# Altium PCB PCB_FINAL_WISH.PcbDoc
Units mm, origin at the board's own origin, x right, y up, seen from the top; angles counter-clockwise.
Board outline 80 x 80 mm, 2 copper layers (Top Layer, Bottom Layer); 12 components, 12 nets, 73 pads, 1 vias.
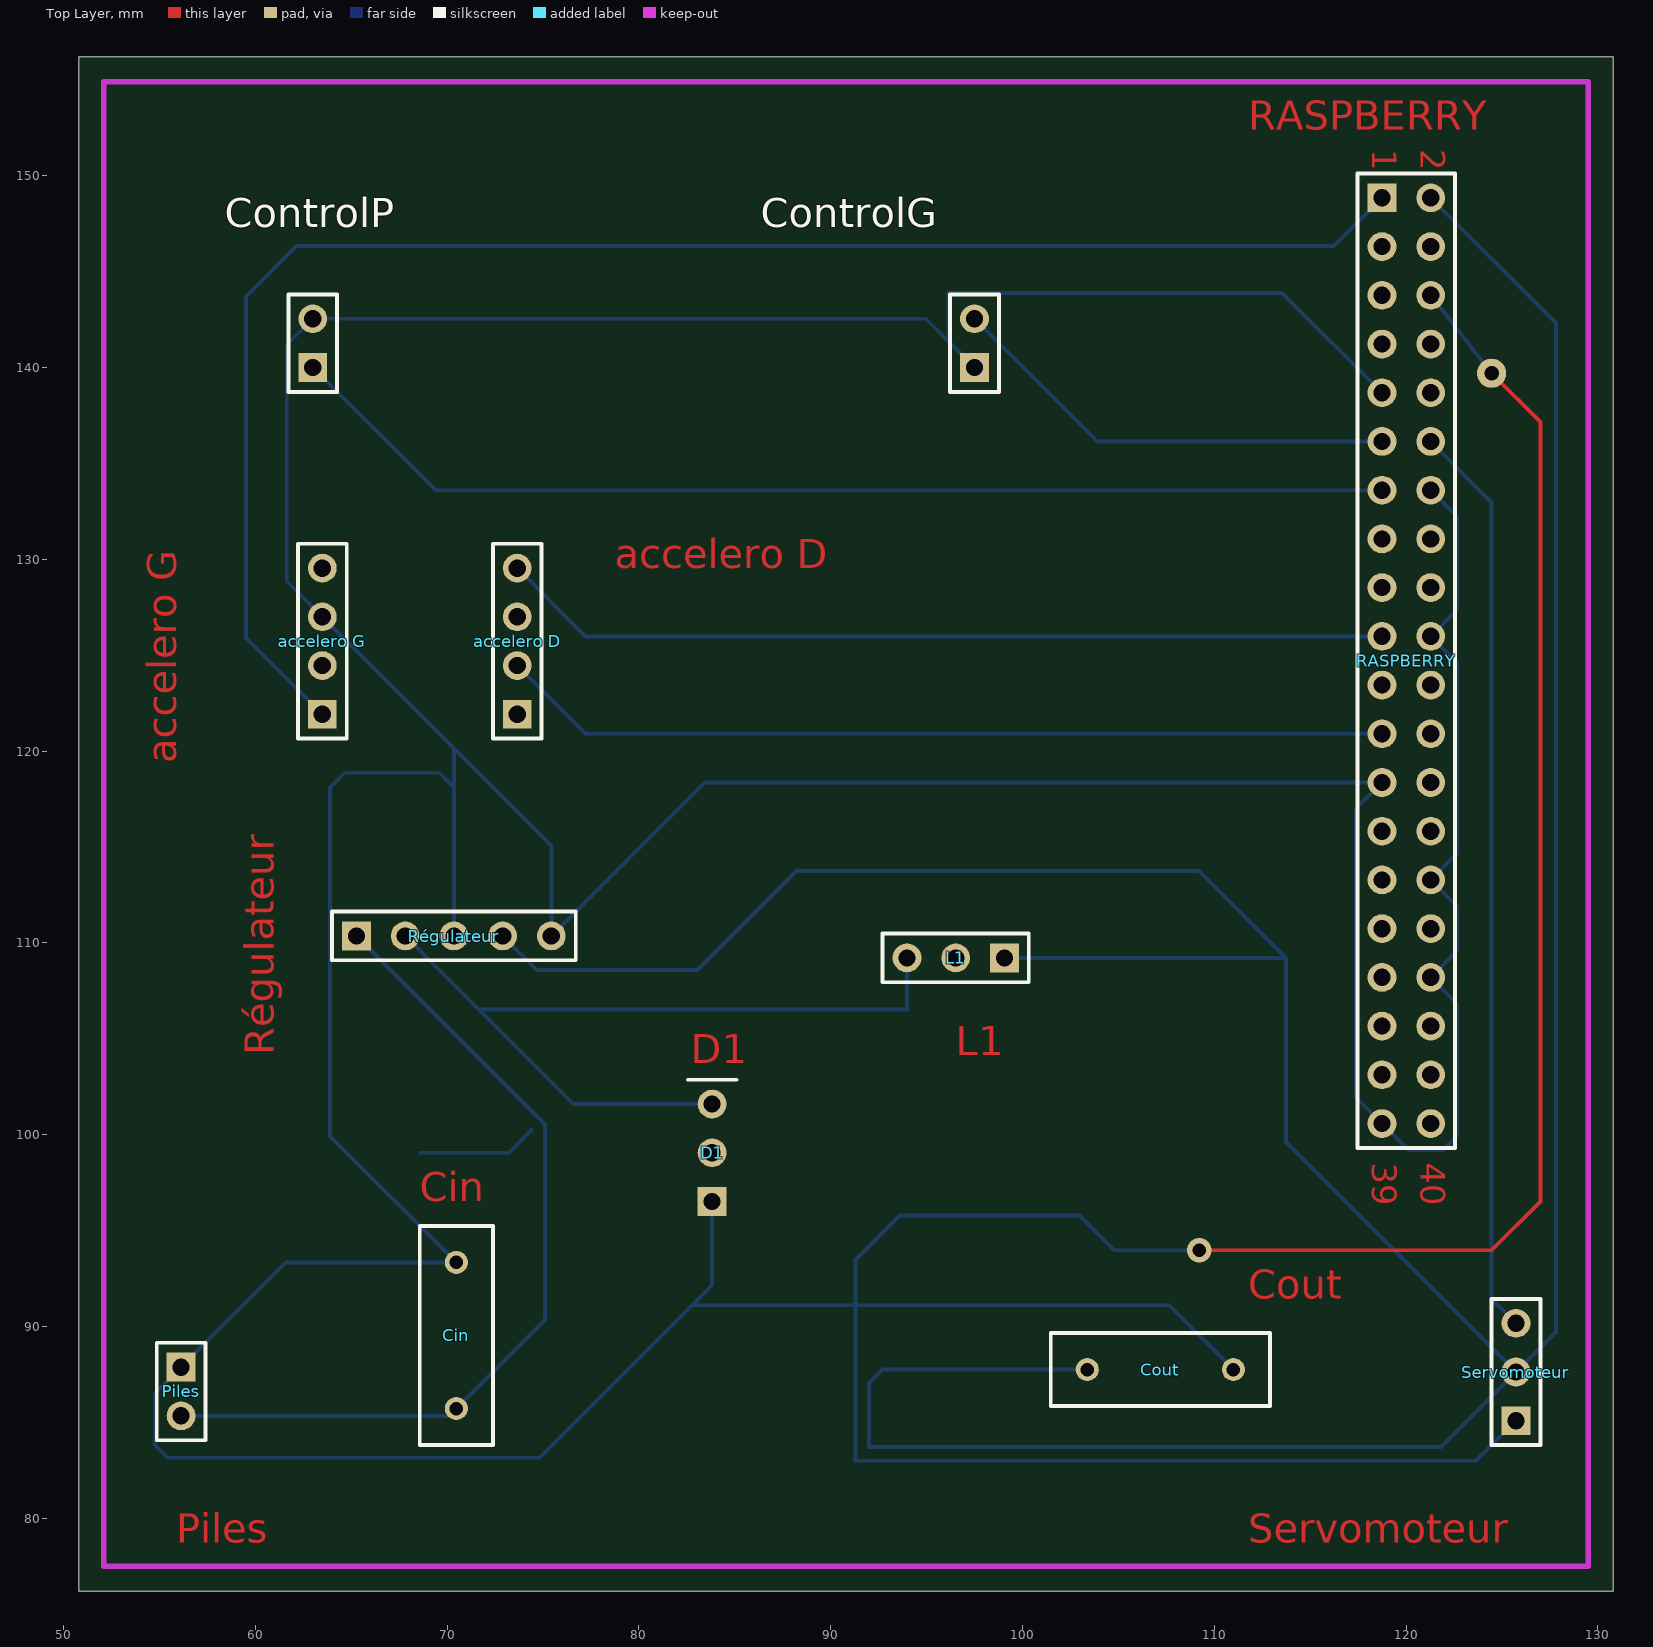
[diagram p0: Top Layer view]
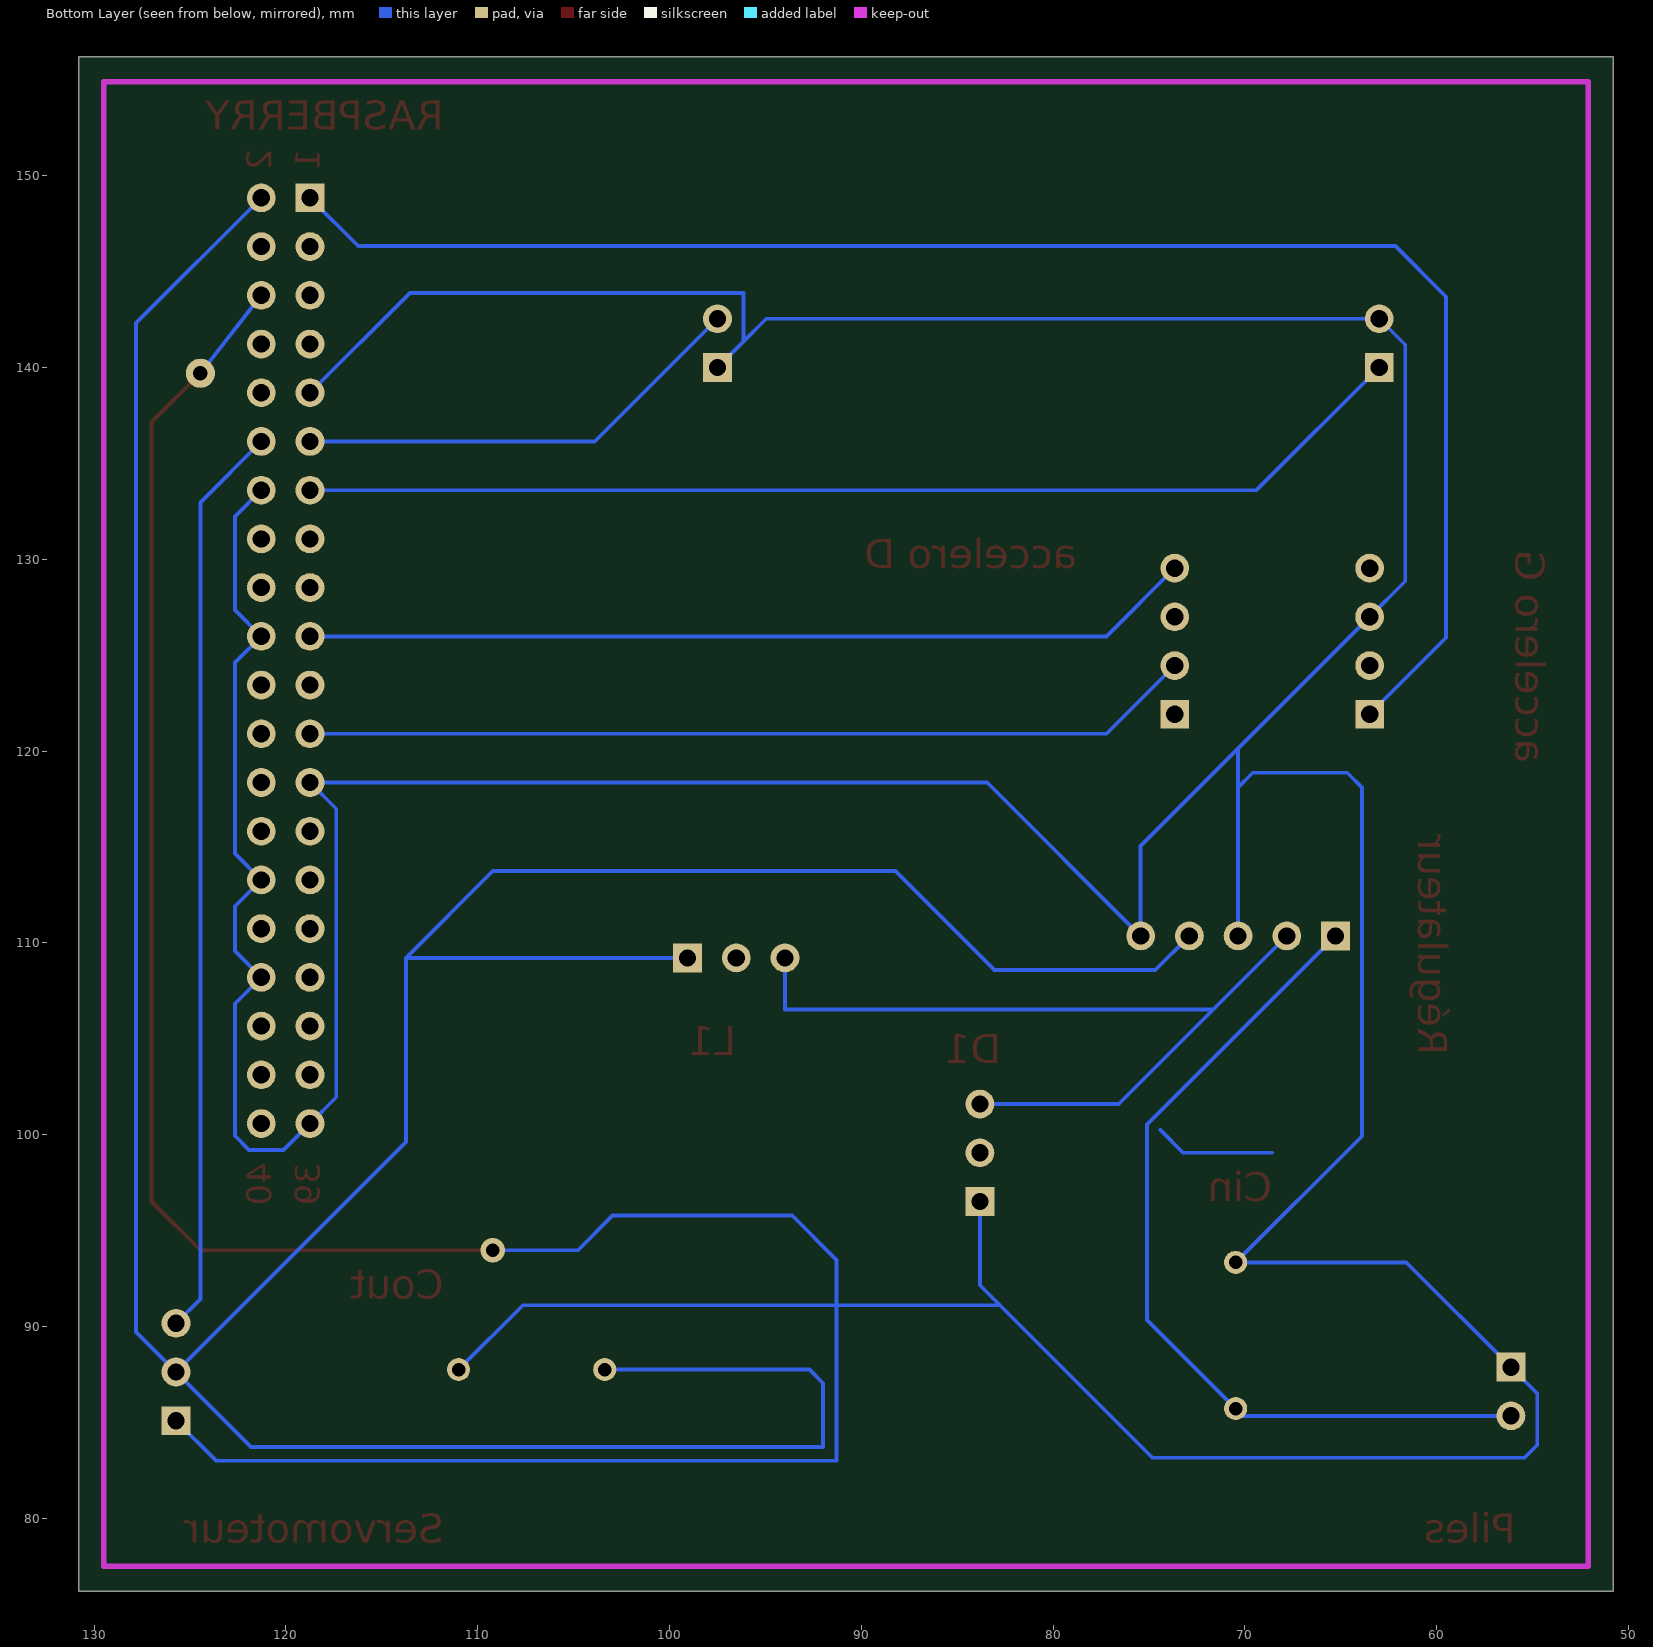
[diagram p1: Bottom Layer view, seen from below]

## Layer stack, top to bottom
Top Solder: solder mask 0.0102, Solder Resist, Dk 3.5
Top Layer: signal copper 0.0356
Dielectric 1: dielectric 0.32, FR-4, Dk 4.8
Bottom Layer: signal copper 0.0356
Bottom Solder: solder mask 0.0102, Solder Resist, Dk 3.5

## Board outline
50.8,76.2 130.8,76.2 130.8,156.2 50.8,156.2

## Design rules (kind name [scope] priority, off if disabled: settings)
Clearance [All] p1: gap=0.5
PolygonConnect [All] p1: connectstyle=Relief reliefconductorwidth=0.254 reliefentries=4 polygonreliefangle="90 Angle" airgapwidth=0.254
RoutingVias [All] p1: holewidth=0.6 width=1 viastyle="Through Hole" minholewidth=0.711 minwidth=1.27 maxholewidth=0.711 maxwidth=1.27
SolderMaskExpansion [All] p1: expansion=0.102
UnpouredPolygon [All] p1: allowunpoured=FALSE
Width [All] p1: maxlimit=0.2 minlimit=0.2 preferedwidth=0.2
29 further rules are at their usual default settings.

## Components (designator, comment, footprint, x,y, rotation, side; value= is the part's Value field where it differs from the comment)
"accelero D" "Header 4" HDR1X4 73.66,121.92 r90 top
"accelero G" "Header 4" HDR1X4 63.5,121.92 r90 top
Cin "Cap" RAD-0.3 70.485,89.535 r90 top
ControlG "Header 2" HDR1X2 97.5,140 r90 top (schematic designator "Controleur Brushless Grand moteur")
ControlP "Header 2" HDR1X2 63,140 r90 top (schematic designator "Controleur Petit moteur")
Cout "Cap" RAD-0.3 107.188,87.757 r0 top
D1 "Header 3" HDR1X3 83.82,96.52 r90 top
L1 "Header 3" HDR1X3 99.06,109.22 r180 top
Piles "Header 2" HDR1X2 56.134,87.884 r270 top
RASPBERRY "Header 20X2" HDR2X20 118.745,148.844 r270 top
Régulateur "Header 5" HDR1X5 65.278,110.363 r0 top
Servomoteur "Header 3" HDR1X3 125.73,85.09 r90 top

## Footprints (in the part's own frame and the unit in brackets; to place one, negate y for a bottom-side part, rotate by r counter-clockwise, add the part's x,y. Pads: shape width x height; smd on the part's side, far side on the other; paste and mask are expansions set on the pad)
HDR1X2 [mm] "Connector; Header; 2 Position"
  rect 1.5x1.5 hole 0.9: 1(0,0)
  round 1.5 hole 0.9: 2(2.54,0)
  silkscreen extent -1.27,-1.27 3.81,1.27
HDR1X3 [mm] "Connector; Header; 3 Position"
  rect 1.5x1.5 hole 0.9: 1(0,0)
  round 1.5 hole 0.9: 2(2.54,0) 3(5.08,0)
  silkscreen extent 6.35,-1.27 6.35,1.27
HDR1X4 [mm] "Connector; Header; 4 Position"
  rect 1.5x1.5 hole 0.9: 1(0,0)
  round 1.5 hole 0.9: 2(2.54,0) 3(5.08,0) 4(7.62,0)
  silkscreen extent -1.27,-1.27 8.89,1.27
HDR1X5 [mm] "Connector; Header; 5 Position"
  rect 1.5x1.5 hole 0.9: 1(0,0)
  round 1.5 hole 0.9: 2(2.54,0) 3(5.08,0) 4(7.62,0) 5(10.16,0)
  silkscreen extent -1.27,-1.27 11.43,1.27
HDR2X20 [mm] "Connector; Header; 20x2 Position"
  rect 1.5x1.5 hole 0.9: 1(0,0)
  round 1.5 hole 0.9: 2(0,2.54) 3(2.54,0) 4(2.54,2.54) 5(5.08,0) 6(5.08,2.54) 7(7.62,0) 8(7.62,2.54) 9(10.16,0) 10(10.16,2.54) 11(12.7,0) 12(12.7,2.54) 13(15.24,0) 14(15.24,2.54) 15(17.78,0) 16(17.78,2.54) 17(20.32,0) 18(20.32,2.54) 19(22.86,0) 20(22.86,2.54) 21(25.4,0) 22(25.4,2.54) 23(27.94,0) 24(27.94,2.54) 25(30.48,0) 26(30.48,2.54) 27(33.02,0) 28(33.02,2.54) 29(35.56,0) 30(35.56,2.54) 31(38.1,0) 32(38.1,2.54) 33(40.64,0) 34(40.64,2.54) 35(43.18,0) 36(43.18,2.54) 37(45.72,0) 38(45.72,2.54) 39(48.26,0) 40(48.26,2.54)
  silkscreen extent -1.27,-1.27 49.53,3.81
RAD-0.3 [mm] "Radial Cap, Thru-Hole; 2 Leads; 0.3 in Pin Spacing"
  round 1.2 hole 0.7: 1(-3.81,0) 2(3.81,0)
  silkscreen extent -5.71,-1.91 5.71,1.91

## Part data
"accelero D" "accelero G": "Header, 4-Pin"
Cin Cout: "Capacitor"
ControlG ControlP Piles: "Header, 2-Pin"
D1 L1 Servomoteur: "Header, 3-Pin"
RASPBERRY: "Header, 20-Pin, Dual row"
Régulateur: "Header, 5-Pin"

## Free pads (board coordinates)
  round 1.524 hole 0.762: 1(124.46,139.7)

## Via types
v1: diameter 1.27, hole 0.711, Top Layer to Bottom Layer, 1 vias

## Nets (pads, with @x,y where several pads share a name; then routed paths per layer and width w, separated by ;. In a path a pad name is that pad's centre, name@x,y a point inside that pad or via, vN(x,y) a via of type N, cw(c..) or ccw(c..) an arc to the next point about the centre after c; other vN are vias at no path point)
GND: "accelero G.3" Cin.2 ControlG.1 ControlP.2 Cout.2 D1.1 pad.1 Piles.1 RASPBERRY.6 RASPBERRY.9 RASPBERRY.14 RASPBERRY.20 RASPBERRY.25 RASPBERRY.30 RASPBERRY.34 RASPBERRY.39 Régulateur.3 Régulateur.5 Servomoteur.1 | length 475.5
  Top Layer w0.2: v1(109.22,93.98) 124.46,93.98 127,96.52 127,137.16 pad.1
  Bottom Layer w0.2: Régulateur.3 70.358,118.11 ; D1.1 83.82,92.151 82.779,91.11 ; ControlG.1 96.139,141.361 ; v1(109.22,93.98) 104.775,93.98 102.974,95.781 93.599,95.781 91.288,93.47 91.288,91.11 ; Cout.2 107.645,91.11 91.288,91.11 ; RASPBERRY.9 113.538,143.891 96.139,143.891 96.139,141.361 ; RASPBERRY.14 122.657,132.232 122.657,127.356 RASPBERRY.20 122.657,124.612 122.657,114.656 RASPBERRY.30 122.657,111.912 122.657,109.576 RASPBERRY.34 122.657,106.832 122.657,99.949 121.92,99.212 120.117,99.212 RASPBERRY.39 117.373,101.956 117.373,116.992 RASPBERRY.25 83.439,118.364 Régulateur.5 75.438,115.062 70.358,120.142 ; RASPBERRY.6 pad.1 ; Servomoteur.1 123.647,83.007 91.288,83.007 91.288,91.11 ; 70.358,118.11 70.358,120.142 ; 70.358,118.11 69.596,118.872 64.668,118.872 63.906,118.11 63.906,99.924 Cin.2 61.595,93.345 Piles.1 54.762,86.512 54.762,83.82 55.423,83.16 74.828,83.16 82.779,91.11 ; 70.358,120.142 63.5,127 61.646,128.854 61.646,141.186 ControlP.2 94.96,142.54 96.139,141.361 ; 82.779,91.11 91.288,91.11
"Netaccelero D_2": "accelero D.2" RASPBERRY.23 | length 46.6
  Bottom Layer w0.2: 73.66,124.46 77.216,120.904 RASPBERRY.23
"Netaccelero D_4": "accelero D.4" RASPBERRY.19 | length 46.6
  Bottom Layer w0.2: 73.66,129.54 77.216,125.984 RASPBERRY.19
"Netaccelero D_6": RASPBERRY.21
"Netaccelero D_8": RASPBERRY.29
"Netaccelero G_1": "accelero G.1" RASPBERRY.1 | length 84.8
  Bottom Layer w0.2: 63.5,121.92 59.512,125.908 59.512,143.688 62.154,146.329 116.23,146.329 RASPBERRY.1
NetCin_1: Cin.1 Piles.2 Régulateur.1 | length 45.1
  Bottom Layer w0.2: Piles.2 70.104,85.344 Cin.1 75.108,90.348 75.108,100.533 Régulateur.1
"NetControleur Brushless Grand moteur_2": ControlG.2 RASPBERRY.11 | length 23.9
  Bottom Layer w0.2: ControlG.2 103.896,136.144 RASPBERRY.11
"NetControleur Petit moteur_1": ControlP.1 RASPBERRY.13 | length 58.4
  Bottom Layer w0.2: ControlP.1 69.396,133.604 RASPBERRY.13
NetCout_1: Cout.1 L1.1 RASPBERRY.2 Régulateur.4 Servomoteur.2 | length 202
  Bottom Layer w0.2: Régulateur.4 74.676,108.585 83.058,108.585 88.214,113.741 109.22,113.741 113.741,109.22 ; L1.1 113.741,109.22 ; Cout.1 92.71,87.757 91.999,87.046 91.999,83.718 121.818,83.718 Servomoteur.2 ; RASPBERRY.2 127.813,142.316 127.813,89.713 Servomoteur.2 ; 113.741,109.22 113.741,99.619 Servomoteur.2
NetD1_3: D1.3 L1.3 Régulateur.2 | length 44.7
  Bottom Layer w0.2: Régulateur.2 71.653,106.528 ; D1.3 76.581,101.6 71.653,106.528 ; L1.3 93.98,106.528 71.653,106.528
NetRASPBERRY_12: RASPBERRY.12 Servomoteur.3 | length 47.8
  Bottom Layer w0.2: RASPBERRY.12 124.46,132.969 124.46,91.44 Servomoteur.3
pads on no net: "accelero D.1" "accelero D.3" "accelero G.2" "accelero G.4" D1.2 L1.2 RASPBERRY.3 RASPBERRY.4 RASPBERRY.5 RASPBERRY.7 RASPBERRY.8 RASPBERRY.10 RASPBERRY.15 RASPBERRY.16 RASPBERRY.17 RASPBERRY.18 RASPBERRY.22 RASPBERRY.24 RASPBERRY.26 RASPBERRY.27 RASPBERRY.28 RASPBERRY.31 RASPBERRY.32 RASPBERRY.33 RASPBERRY.35 RASPBERRY.36 RASPBERRY.37 RASPBERRY.38 RASPBERRY.40
copper on no net: | length 6.3
  Bottom Layer w0.2: 68.58,99.06 73.225,99.06 74.408,100.243

## Keep-outs
Keep-Out Layer:
  lines w0.3: 52.1,77.5 52.1,154.9 129.5,154.9 129.5,77.5 52.1,77.5

## Silkscreen, mask and mechanical layers (free items; w line width, h text height)
Drill Drawing:
  text ".LEGEND" at 135.88,81.28 h1.52
  text "Drill Drawing." at 135.88,78.74 h1.52

## Dimensions
52.1,77.5 to 52.1,154.9 on Mechanical 1
52.1,77.5 to 129.5,77.5 on Mechanical 1

## Text inside footprints (layer, text, board x,y; h text height)
RASPBERRY: Top Layer "1" at 118.237,151.384 h1.27 r270; Top Layer "2" at 120.777,151.384 h1.27 r270; Top Layer "39" at 118.237,98.552 h1.27 r270; Top Layer "40" at 120.777,98.552 h1.27 r270